# EAGLE board Qwiic Joystick v1.1.1-Panel (EAGLE 9.1.3)
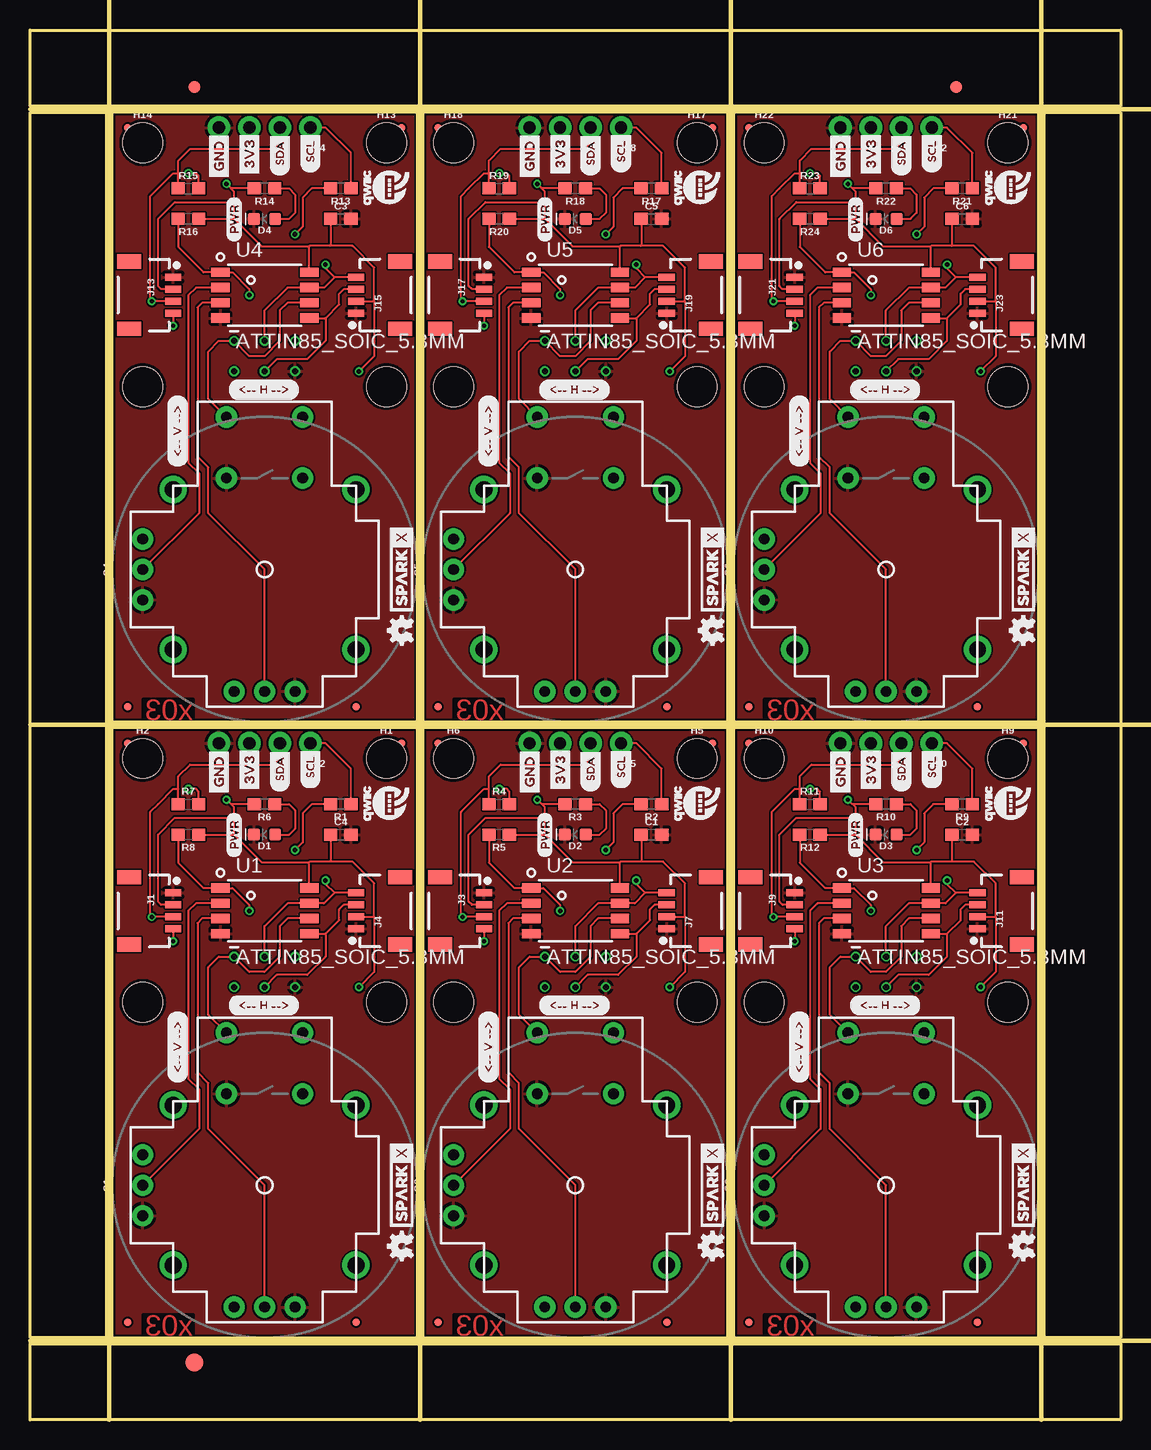
[diagram p0: board, top side]
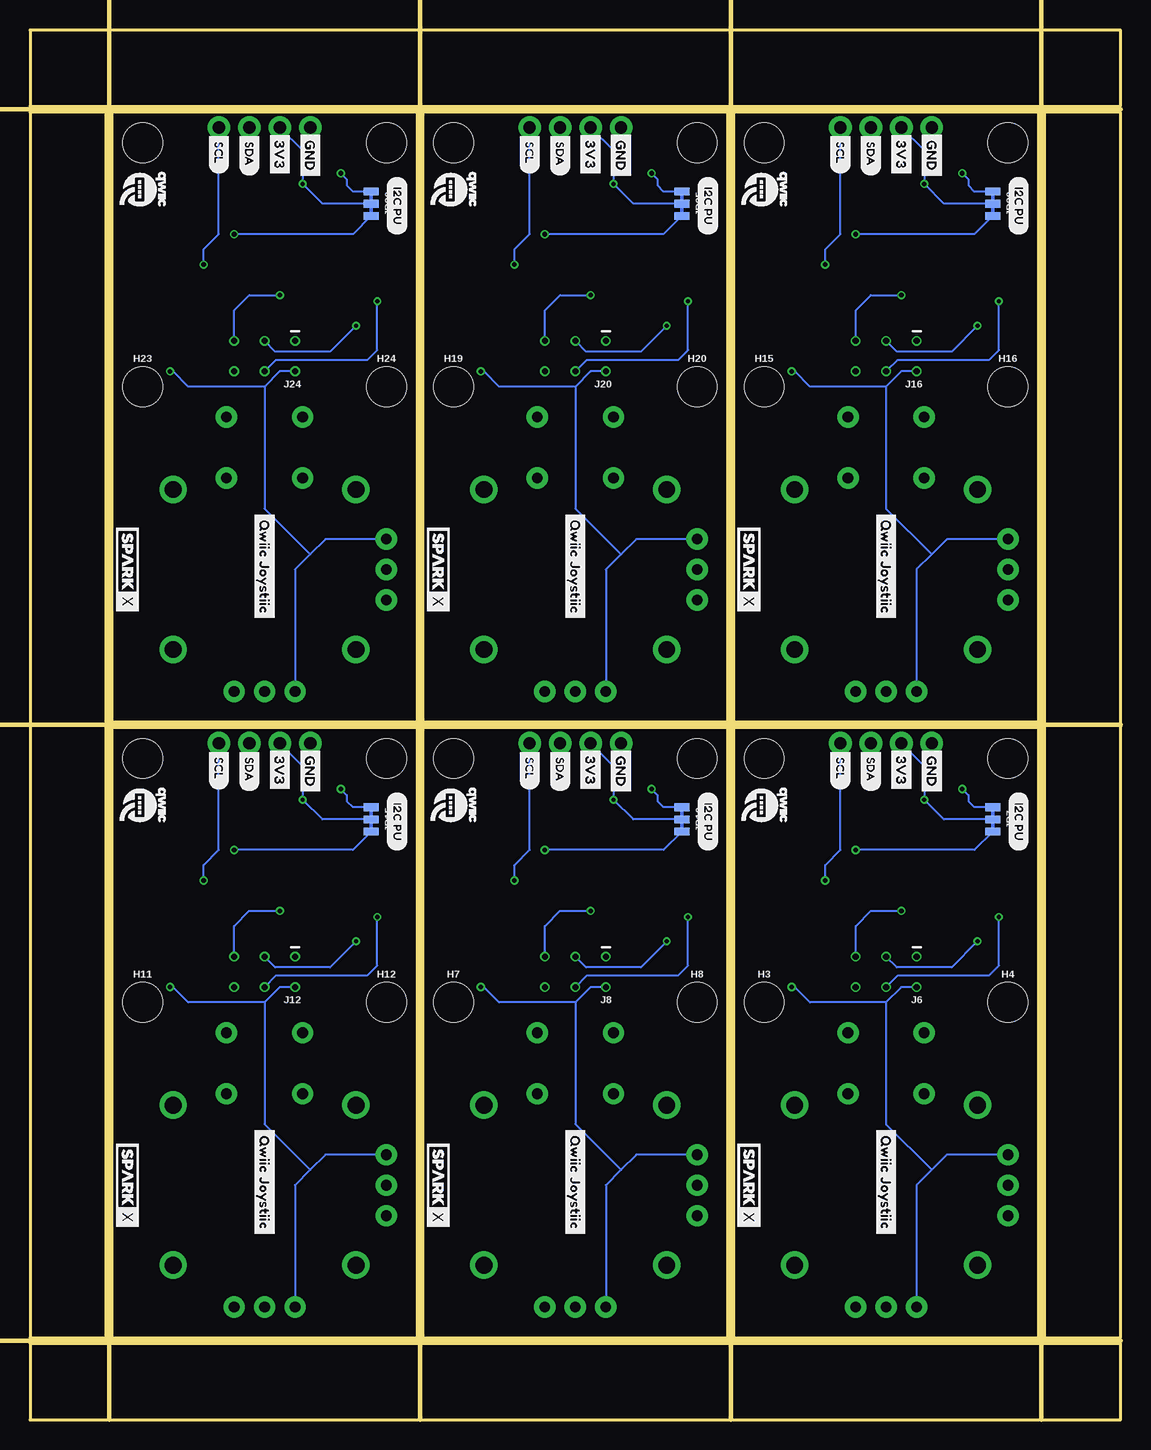
[diagram p1: board, bottom side, seen from below]

Size 90.93 x 115.82 mm. Coordinates in mm from the lower left corner, seen from the top.
Outline: 6.86,57.66 6.86,6.86 32.26,6.86 32.26,57.66 6.86,57.66
Outline: 32.77,57.66 32.77,6.86 58.17,6.86 58.17,57.66 32.77,57.66
Outline: 58.67,57.66 58.67,6.86 84.07,6.86 84.07,57.66 58.67,57.66
Outline: 6.86,108.97 6.86,58.17 32.26,58.17 32.26,108.97 6.86,108.97
Outline: 32.77,108.97 32.77,58.17 58.17,58.17 58.17,108.97 32.77,108.97
Outline: 58.67,108.97 58.67,58.17 84.07,58.17 84.07,108.97 58.67,108.97
Outline: 0,6.35 90.93,6.35 90.93,0 0,0 0,6.35
Outline: 84.58,108.97 90.93,108.97 90.93,6.86 84.58,6.86 84.58,108.97
Outline: 0,115.82 90.93,115.82 90.93,109.47 0,109.47 0,115.82
Outline: 0,108.97 6.35,108.97 6.35,6.86 0,6.86 0,108.97
Copper layers (1*16): Top 0.035mm / dielectric 1.5mm / Bottom 0.035mm
Design rules "SparkFun-2-layer-PCBWay-LIMIT": minimum track width 6mil, minimum drill 0.3mm, track to track 6mil, track to pad 6mil, pad to pad 6mil, via to via 6mil, smd to smd 6mil, copper to edge 6mil, drill to drill 6mil, minimum pad ring 6mil, minimum via ring 6mil, stop-mask expansion 4mil, vias tented up to drill 25mil, thermal gap 10mil
Milling: 7 lines

## Footprints (pad centres in the part's own frame; a part is rotated, then mirrored left to right if it is on the bottom)
0603 = smd 1.1 x 1: 1 -0.85,0; 2 0.85,0
LED-0603 = smd 1 x 1: A -0.877,0; C 0.877,0
FIDUCIAL-1X2 = smd 1 x 1: 1 0,0
FIDUCIAL-1.5X3 = smd 1.5 x 1.5: 1 0,0
STAND-OFF = hole 3.302: 0,0
1X04_1MM_RA = smd 0.6 x 1.35: 1 -1.5,0; 2 -0.5,0; 3 0.5,0; 4 1.5,0 | smd 1.2 x 2: NC1 2.8,-3.675; NC2 -2.8,-3.675
1X04_NO_SILK = drill 1.016 pad 1.88: 1 0,0; 2 2.54,0; 3 5.08,0; 4 7.62,0
2X3_TEST_POINTS = drill 0.508: 1 -2.54,-1.27; 2 -2.54,1.27; 3 0,-1.27; 4 0,1.27; 5 2.54,-1.27; 6 2.54,1.27
MICRO-FIDUCIAL = smd 0.635 x 0.635: 1 0,0
SMT-JUMPER_3_2-NC_TRACE_NO-SILK = smd 0.635 x 1.27: 1 -1.016,0; 2 0,0; 3 1.016,0
JOYSTICK = drill 0.9 pad 1.778: B1A -3.175,12.7; B1B 3.175,12.7; B2A -3.175,7.62; B2B 3.175,7.62 | drill 0.889 pad 1.778: H1 -2.54,-10.16; H2 0,-10.16; H3 2.54,-10.16; V1 -10.16,2.54; V2 -10.16,0; V3 -10.16,-2.54 | drill 1.397 pad 2.286: MOUNT1 -7.62,6.668; MOUNT2 -7.62,-6.668; MOUNT3 7.62,-6.668; MOUNT4 7.62,6.668
ATTINY85 = smd 1.524 x 0.762: 1 -3.683,1.905; 2 -3.683,0.635; 3 -3.683,-0.635; 4 -3.683,-1.905; 5 3.727,-1.905; 6 3.727,-0.635; 7 3.727,0.635; 8 3.727,1.905

## Placement (x,y rotation side)
C1  0.1uF  [0603]  51.82,48.77 0 top
C2  0.1uF  [0603]  77.72,48.77 0 top
C3  0.1uF  [0603]  25.91,100.08 0 top
C4  0.1uF  [0603]  25.91,48.77 0 top
C5  0.1uF  [0603]  51.82,100.08 0 top
C6  0.1uF  [0603]  77.72,100.08 0 top
D1  RED  [LED-0603]  19.56,48.77 180 top
D2  RED  [LED-0603]  45.47,48.77 180 top
D3  RED  [LED-0603]  71.37,48.77 180 top
D4  RED  [LED-0603]  19.56,100.08 180 top
D5  RED  [LED-0603]  45.47,100.08 180 top
D6  RED  [LED-0603]  71.37,100.08 180 top
E$1  [FIDUCIAL-1X2]  13.72,111.06 0 top
E$2  [FIDUCIAL-1X2]  77.22,111.06 0 top
E$3  [FIDUCIAL-1.5X3]  13.72,4.76 0 top
FRAME1  FRAME-LETTER  [CREATIVE_COMMONS]  -5.84,-5.84 0 top  (outside the outline)
FRAME2  FRAME-LETTER  [CREATIVE_COMMONS]  20.07,-5.84 0 top  (outside the outline)
FRAME3  FRAME-LETTER  [CREATIVE_COMMONS]  45.97,-5.84 0 top  (outside the outline)
FRAME4  FRAME-LETTER  [CREATIVE_COMMONS]  -5.84,45.47 0 top  (outside the outline)
FRAME5  FRAME-LETTER  [CREATIVE_COMMONS]  20.07,45.47 0 top
FRAME6  FRAME-LETTER  [CREATIVE_COMMONS]  45.97,45.47 0 top
H1  STAND-OFF  [STAND-OFF]  29.72,55.12 0 top
H2  STAND-OFF  [STAND-OFF]  9.4,55.12 0 top
H3  STAND-OFF  [STAND-OFF]  29.72,34.8 0 bottom
H4  STAND-OFF  [STAND-OFF]  9.4,34.8 0 bottom
H5  STAND-OFF  [STAND-OFF]  55.63,55.12 0 top
H6  STAND-OFF  [STAND-OFF]  35.31,55.12 0 top
H7  STAND-OFF  [STAND-OFF]  55.63,34.8 0 bottom
H8  STAND-OFF  [STAND-OFF]  35.31,34.8 0 bottom
H9  STAND-OFF  [STAND-OFF]  81.53,55.12 0 top
H10  STAND-OFF  [STAND-OFF]  61.21,55.12 0 top
H11  STAND-OFF  [STAND-OFF]  81.53,34.8 0 bottom
H12  STAND-OFF  [STAND-OFF]  61.21,34.8 0 bottom
H13  STAND-OFF  [STAND-OFF]  29.72,106.43 0 top
H14  STAND-OFF  [STAND-OFF]  9.4,106.43 0 top
H15  STAND-OFF  [STAND-OFF]  29.72,86.11 0 bottom
H16  STAND-OFF  [STAND-OFF]  9.4,86.11 0 bottom
H17  STAND-OFF  [STAND-OFF]  55.63,106.43 0 top
H18  STAND-OFF  [STAND-OFF]  35.31,106.43 0 top
H19  STAND-OFF  [STAND-OFF]  55.63,86.11 0 bottom
H20  STAND-OFF  [STAND-OFF]  35.31,86.11 0 bottom
H21  STAND-OFF  [STAND-OFF]  81.53,106.43 0 top
H22  STAND-OFF  [STAND-OFF]  61.21,106.43 0 top
H23  STAND-OFF  [STAND-OFF]  81.53,86.11 0 bottom
H24  STAND-OFF  [STAND-OFF]  61.21,86.11 0 bottom
J1  Qwiic Right Angle  [1X04_1MM_RA]  11.94,42.42 270 top
J2  [1X04_NO_SILK]  23.37,56.39 180 top
J3  Qwiic Right Angle  [1X04_1MM_RA]  37.85,42.42 270 top
J4  Qwiic Right Angle  [1X04_1MM_RA]  27.18,42.42 90 top
J5  [1X04_NO_SILK]  49.28,56.39 180 top
J6  AVR_SPI_PROG_3X2TESTPOINTS  [2X3_TEST_POINTS]  19.56,37.34 180 bottom
J7  Qwiic Right Angle  [1X04_1MM_RA]  53.09,42.42 90 top
J8  AVR_SPI_PROG_3X2TESTPOINTS  [2X3_TEST_POINTS]  45.47,37.34 180 bottom
J9  Qwiic Right Angle  [1X04_1MM_RA]  63.75,42.42 270 top
J10  [1X04_NO_SILK]  75.18,56.39 180 top
J11  Qwiic Right Angle  [1X04_1MM_RA]  78.99,42.42 90 top
J12  AVR_SPI_PROG_3X2TESTPOINTS  [2X3_TEST_POINTS]  71.37,37.34 180 bottom
J13  Qwiic Right Angle  [1X04_1MM_RA]  11.94,93.73 270 top
J14  [1X04_NO_SILK]  23.37,107.7 180 top
J15  Qwiic Right Angle  [1X04_1MM_RA]  27.18,93.73 90 top
J16  AVR_SPI_PROG_3X2TESTPOINTS  [2X3_TEST_POINTS]  19.56,88.65 180 bottom
J17  Qwiic Right Angle  [1X04_1MM_RA]  37.85,93.73 270 top
J18  [1X04_NO_SILK]  49.28,107.7 180 top
J19  Qwiic Right Angle  [1X04_1MM_RA]  53.09,93.73 90 top
J20  AVR_SPI_PROG_3X2TESTPOINTS  [2X3_TEST_POINTS]  45.47,88.65 180 bottom
J21  Qwiic Right Angle  [1X04_1MM_RA]  63.75,93.73 270 top
J22  [1X04_NO_SILK]  75.18,107.7 180 top
J23  Qwiic Right Angle  [1X04_1MM_RA]  78.99,93.73 90 top
J24  AVR_SPI_PROG_3X2TESTPOINTS  [2X3_TEST_POINTS]  71.37,88.65 180 bottom
JP1  FIDUCIALUFIDUCIAL  [MICRO-FIDUCIAL]  30.99,56.39 270 top
JP2  FIDUCIALUFIDUCIAL  [MICRO-FIDUCIAL]  8.13,8.13 0 top
JP3  FIDUCIALUFIDUCIAL  [MICRO-FIDUCIAL]  27.18,8.13 270 top
JP4  FIDUCIALUFIDUCIAL  [MICRO-FIDUCIAL]  56.9,56.39 270 top
JP5  FIDUCIALUFIDUCIAL  [MICRO-FIDUCIAL]  34.04,8.13 0 top
JP6  FIDUCIALUFIDUCIAL  [MICRO-FIDUCIAL]  8.13,56.39 270 top
JP7  JUMPER-SMT_3_2-NC_TRACE_NO-SILK  [SMT-JUMPER_3_2-NC_TRACE_NO-SILK]  10.67,50.04 270 bottom
JP8  FIDUCIALUFIDUCIAL  [MICRO-FIDUCIAL]  53.09,8.13 270 top
JP9  FIDUCIALUFIDUCIAL  [MICRO-FIDUCIAL]  34.04,56.39 270 top
JP10  JUMPER-SMT_3_2-NC_TRACE_NO-SILK  [SMT-JUMPER_3_2-NC_TRACE_NO-SILK]  36.58,50.04 270 bottom
JP11  FIDUCIALUFIDUCIAL  [MICRO-FIDUCIAL]  82.8,56.39 270 top
JP12  FIDUCIALUFIDUCIAL  [MICRO-FIDUCIAL]  59.94,8.13 0 top
JP13  FIDUCIALUFIDUCIAL  [MICRO-FIDUCIAL]  78.99,8.13 270 top
JP14  FIDUCIALUFIDUCIAL  [MICRO-FIDUCIAL]  59.94,56.39 270 top
JP15  JUMPER-SMT_3_2-NC_TRACE_NO-SILK  [SMT-JUMPER_3_2-NC_TRACE_NO-SILK]  62.48,50.04 270 bottom
JP16  FIDUCIALUFIDUCIAL  [MICRO-FIDUCIAL]  30.99,107.7 270 top
JP17  FIDUCIALUFIDUCIAL  [MICRO-FIDUCIAL]  8.13,59.44 0 top
JP18  FIDUCIALUFIDUCIAL  [MICRO-FIDUCIAL]  27.18,59.44 270 top
JP19  FIDUCIALUFIDUCIAL  [MICRO-FIDUCIAL]  8.13,107.7 270 top
JP20  JUMPER-SMT_3_2-NC_TRACE_NO-SILK  [SMT-JUMPER_3_2-NC_TRACE_NO-SILK]  10.67,101.35 270 bottom
JP21  FIDUCIALUFIDUCIAL  [MICRO-FIDUCIAL]  56.9,107.7 270 top
JP22  FIDUCIALUFIDUCIAL  [MICRO-FIDUCIAL]  34.04,59.44 0 top
JP23  FIDUCIALUFIDUCIAL  [MICRO-FIDUCIAL]  53.09,59.44 270 top
JP24  FIDUCIALUFIDUCIAL  [MICRO-FIDUCIAL]  34.04,107.7 270 top
JP25  JUMPER-SMT_3_2-NC_TRACE_NO-SILK  [SMT-JUMPER_3_2-NC_TRACE_NO-SILK]  36.58,101.35 270 bottom
JP26  FIDUCIALUFIDUCIAL  [MICRO-FIDUCIAL]  82.8,107.7 270 top
JP27  FIDUCIALUFIDUCIAL  [MICRO-FIDUCIAL]  59.94,59.44 0 top
JP28  FIDUCIALUFIDUCIAL  [MICRO-FIDUCIAL]  78.99,59.44 270 top
JP29  FIDUCIALUFIDUCIAL  [MICRO-FIDUCIAL]  59.94,107.7 270 top
JP30  JUMPER-SMT_3_2-NC_TRACE_NO-SILK  [SMT-JUMPER_3_2-NC_TRACE_NO-SILK]  62.48,101.35 270 bottom
LOGO1  OSHW-LOGOMINI  [OSHW-LOGO-MINI]  30.99,14.48 90 top
LOGO2  OSHW-LOGOMINI  [OSHW-LOGO-MINI]  56.9,14.48 90 top
LOGO3  OSHW-LOGOMINI  [OSHW-LOGO-MINI]  82.8,14.48 90 top
LOGO4  OSHW-LOGOMINI  [OSHW-LOGO-MINI]  30.99,65.79 90 top
LOGO5  OSHW-LOGOMINI  [OSHW-LOGO-MINI]  56.9,65.79 90 top
LOGO6  OSHW-LOGOMINI  [OSHW-LOGO-MINI]  82.8,65.79 90 top
R1  2.2K  [0603]  25.91,51.31 180 top
R2  2.2K  [0603]  51.82,51.31 180 top
R3  1k  [0603]  45.47,51.31 180 top
R4  2.2K  [0603]  39.12,51.31 0 top
R5  10K  [0603]  39.12,48.77 180 top
R6  1k  [0603]  19.56,51.31 180 top
R7  2.2K  [0603]  13.21,51.31 0 top
R8  10K  [0603]  13.21,48.77 180 top
R9  2.2K  [0603]  77.72,51.31 180 top
R10  1k  [0603]  71.37,51.31 180 top
R11  2.2K  [0603]  65.02,51.31 0 top
R12  10K  [0603]  65.02,48.77 180 top
R13  2.2K  [0603]  25.91,102.62 180 top
R14  1k  [0603]  19.56,102.62 180 top
R15  2.2K  [0603]  13.21,102.62 0 top
R16  10K  [0603]  13.21,100.08 180 top
R17  2.2K  [0603]  51.82,102.62 180 top
R18  1k  [0603]  45.47,102.62 180 top
R19  2.2K  [0603]  39.12,102.62 0 top
R20  10K  [0603]  39.12,100.08 180 top
R21  2.2K  [0603]  77.72,102.62 180 top
R22  1k  [0603]  71.37,102.62 180 top
R23  2.2K  [0603]  65.02,102.62 0 top
R24  10K  [0603]  65.02,100.08 180 top
S1  JOYSTICK_THUMB  [JOYSTICK]  19.56,19.56 0 top
S2  JOYSTICK_THUMB  [JOYSTICK]  45.47,19.56 0 top
S3  JOYSTICK_THUMB  [JOYSTICK]  71.37,19.56 0 top
S4  JOYSTICK_THUMB  [JOYSTICK]  19.56,70.87 0 top
S5  JOYSTICK_THUMB  [JOYSTICK]  45.47,70.87 0 top
S6  JOYSTICK_THUMB  [JOYSTICK]  71.37,70.87 0 top
U1  ATTIN85_SOIC_5.3MM  [ATTINY85]  19.56,42.42 0 top
U2  ATTIN85_SOIC_5.3MM  [ATTINY85]  45.47,42.42 0 top
U3  ATTIN85_SOIC_5.3MM  [ATTINY85]  71.37,42.42 0 top
U4  ATTIN85_SOIC_5.3MM  [ATTINY85]  19.56,93.73 0 top
U5  ATTIN85_SOIC_5.3MM  [ATTINY85]  45.47,93.73 0 top
U6  ATTIN85_SOIC_5.3MM  [ATTINY85]  71.37,93.73 0 top
U$1  SPARKX-LOGO3  [SPARKX-SMALL]  30.99,19.56 90 top
U$2  SPARKX-LOGO3  [SPARKX-SMALL]  30.99,19.56 270 bottom
U$3  [QWIIC_JOYSTIIC6]  19.56,24.64 270 bottom
U$4  [I2C_PU0]  8.51,52.32 270 bottom
U$5  [SDA0]  20.83,56.13 270 bottom
U$6  [GND4]  15.75,51.82 90 top
U$7  [###_V_###0]  12.32,28.07 90 top
U$8  [GND4]  15.75,56.26 270 bottom
U$9  [SCL1]  23.37,56.13 270 bottom
U$10  [QWIIC-LOGO-SMALL]  29.72,51.31 270 bottom
U$11  [SCL3]  23.37,52.58 90 top
U$12  [SDA2]  20.83,52.32 90 top
U$13  SPARKX-LOGO3  [SPARKX-SMALL]  56.9,19.56 90 top
U$14  [PWR-()-03]  17.02,46.86 90 top
U$15  [###_H_###1]  16.51,34.54 0 top
U$16  [3V35]  18.29,52.07 90 top
U$17  [3V35]  18.29,56.26 270 bottom
U$18  SPARKX-LOGO3  [SPARKX-SMALL]  56.9,19.56 270 bottom
U$19  [QWIIC-LOGO-SMALL]  55.63,51.31 270 bottom
U$20  [PWR-()-03]  42.93,46.86 90 top
U$21  [###_V_###0]  38.23,28.07 90 top
U$22  [QWIIC-LOGO-SMALL]  29.72,51.31 90 top
U$23  [###_H_###1]  42.42,34.54 0 top
U$24  [QWIIC-LOGO-SMALL]  55.63,51.31 90 top
U$25  [SDA0]  46.74,56.13 270 bottom
U$26  [SCL1]  49.28,56.13 270 bottom
U$27  [SCL3]  49.28,52.58 90 top
U$28  [SDA2]  46.74,52.32 90 top
U$29  [QWIIC_JOYSTIIC6]  45.47,24.64 270 bottom
U$30  [GND4]  41.66,51.82 90 top
U$31  [GND4]  41.66,56.26 270 bottom
U$32  [3V35]  44.2,52.07 90 top
U$33  [3V35]  44.2,56.26 270 bottom
U$34  [I2C_PU0]  34.42,52.32 270 bottom
U$35  SPARKX-LOGO3  [SPARKX-SMALL]  82.8,19.56 90 top
U$36  SPARKX-LOGO3  [SPARKX-SMALL]  82.8,19.56 270 bottom
U$37  [QWIIC-LOGO-SMALL]  81.53,51.31 270 bottom
U$38  [PWR-()-03]  68.83,46.86 90 top
U$39  [###_V_###0]  64.14,28.07 90 top
U$40  [###_H_###1]  68.33,34.54 0 top
U$41  [QWIIC-LOGO-SMALL]  81.53,51.31 90 top
U$42  [SDA0]  72.64,56.13 270 bottom
U$43  [SCL1]  75.18,56.13 270 bottom
U$44  [SCL3]  75.18,52.58 90 top
U$45  [SDA2]  72.64,52.32 90 top
U$46  [QWIIC_JOYSTIIC6]  71.37,24.64 270 bottom
U$47  [GND4]  67.56,51.82 90 top
U$48  [GND4]  67.56,56.26 270 bottom
U$49  [3V35]  70.1,52.07 90 top
U$50  [3V35]  70.1,56.26 270 bottom
U$51  [I2C_PU0]  60.32,52.32 270 bottom
U$52  SPARKX-LOGO3  [SPARKX-SMALL]  30.99,70.87 90 top
U$53  SPARKX-LOGO3  [SPARKX-SMALL]  30.99,70.87 270 bottom
U$54  [QWIIC-LOGO-SMALL]  29.72,102.62 270 bottom
U$55  [PWR-()-03]  17.02,98.17 90 top
U$56  [###_V_###0]  12.32,79.38 90 top
U$57  [###_H_###1]  16.51,85.85 0 top
U$58  [QWIIC-LOGO-SMALL]  29.72,102.62 90 top
U$59  [SDA0]  20.83,107.44 270 bottom
U$60  [SCL1]  23.37,107.44 270 bottom
U$61  [SCL3]  23.37,103.89 90 top
U$62  [SDA2]  20.83,103.63 90 top
U$63  [QWIIC_JOYSTIIC6]  19.56,75.95 270 bottom
U$64  [GND4]  15.75,103.12 90 top
U$65  [GND4]  15.75,107.57 270 bottom
U$66  [3V35]  18.29,103.38 90 top
U$67  [3V35]  18.29,107.57 270 bottom
U$68  [I2C_PU0]  8.51,103.63 270 bottom
U$69  SPARKX-LOGO3  [SPARKX-SMALL]  56.9,70.87 90 top
U$70  SPARKX-LOGO3  [SPARKX-SMALL]  56.9,70.87 270 bottom
U$71  [QWIIC-LOGO-SMALL]  55.63,102.62 270 bottom
U$72  [PWR-()-03]  42.93,98.17 90 top
U$73  [###_V_###0]  38.23,79.38 90 top
U$74  [###_H_###1]  42.42,85.85 0 top
U$75  [QWIIC-LOGO-SMALL]  55.63,102.62 90 top
U$76  [SDA0]  46.74,107.44 270 bottom
U$77  [SCL1]  49.28,107.44 270 bottom
U$78  [SCL3]  49.28,103.89 90 top
U$79  [SDA2]  46.74,103.63 90 top
U$80  [QWIIC_JOYSTIIC6]  45.47,75.95 270 bottom
U$81  [GND4]  41.66,103.12 90 top
U$82  [GND4]  41.66,107.57 270 bottom
U$83  [3V35]  44.2,103.38 90 top
U$84  [3V35]  44.2,107.57 270 bottom
U$85  [I2C_PU0]  34.42,103.63 270 bottom
U$86  SPARKX-LOGO3  [SPARKX-SMALL]  82.8,70.87 90 top
U$87  SPARKX-LOGO3  [SPARKX-SMALL]  82.8,70.87 270 bottom
U$88  [QWIIC-LOGO-SMALL]  81.53,102.62 270 bottom
U$89  [PWR-()-03]  68.83,98.17 90 top
U$90  [###_V_###0]  64.14,79.38 90 top
U$91  [###_H_###1]  68.33,85.85 0 top
U$92  [QWIIC-LOGO-SMALL]  81.53,102.62 90 top
U$93  [SDA0]  72.64,107.44 270 bottom
U$94  [SCL1]  75.18,107.44 270 bottom
U$95  [SCL3]  75.18,103.89 90 top
U$96  [SDA2]  72.64,103.63 90 top
U$97  [QWIIC_JOYSTIIC6]  71.37,75.95 270 bottom
U$98  [GND4]  67.56,103.12 90 top
U$99  [GND4]  67.56,107.57 270 bottom
U$100  [3V35]  70.1,103.38 90 top
U$101  [3V35]  70.1,107.57 270 bottom
U$102  [I2C_PU0]  60.32,103.63 270 bottom

## Library data of the parts
C1-C6 = SparkFun-Capacitors; PROD_ID: CAP-00810
D1-D6 = SparkFun-LED; PROD_ID: DIO-00819
E$1 E$2 FRAME1-FRAME6 LOGO1-LOGO6 = SparkFun-Aesthetics
E$3 = SparkFun-Retired
H1-H24 = SparkFun-Hardware
J1 J3 J4 J7 J9 J11 J13 J15 J17 J19 J21 J23 = SparkFun-Connectors; PROD_ID: CONN-13694
J2 J5 J10 J14 J18 J22 = SparkFun-Connectors; PROD_ID: CONN-09696
J6 J8 J12 J16 J20 J24 = SparkFun-Connectors
JP1-JP6 JP8 JP9 JP11-JP14 JP16-JP19 JP21-JP24 JP26-JP29 = SparkFun
JP7 JP10 JP15 JP20 JP25 JP30 = SparkFun-Jumpers
R1 R2 R4 R7 R9 R11 R13 R15 R17 R19 R21 R23 = SparkFun-Resistors; PROD_ID: RES-07857
R3 R6 R10 R14 R18 R22 = SparkFun-Resistors; PROD_ID: RES-07856
R5 R8 R12 R16 R20 R24 = SparkFun-Resistors; PROD_ID: RES-00818
S1-S6 = SparkFun-Switches; PROD_ID: COMP-09744; SF_SKU: COM-09032
U1-U6 = attiny85
U$1 U$2 U$13 U$18 U$35 U$36 U$52 U$53 U$69 U$70 U$86 U$87 = SparkX
U$3 U$6 U$8 U$16 U$17 U$29-U$33 U$46-U$50 U$63-U$67 U$80-U$84 U$97-U$101 = buzzard_labels (5)
U$4 U$34 U$51 U$68 U$85 U$102 = buzzard_labels (6)
U$5 U$9 U$11 U$12 U$25-U$28 U$42-U$45 U$59-U$62 U$76-U$79 U$93-U$96 = buzzard_labels (3)
U$7 U$15 U$21 U$23 U$39 U$40 U$56 U$57 U$73 U$74 U$90 U$91 = buzzard_labels (1)
U$10 U$14 U$19 U$20 U$22 U$24 U$37 U$38 U$41 U$54 U$55 U$58 U$71 U$72 U$75 U$88 U$89 U$92 = Labels

## Nets
3.3V: C4.1 J1.2 J2.3 J4.2 J6.2 JP7.2 R6.2 R8.1 S1.H1 S1.V1 U1.8
3.3V1: C1.1 J3.2 J5.3 J7.2 J8.2 JP10.2 R3.2 R5.1 S2.H1 S2.V1 U2.8
3.3V2: C2.1 J9.2 J10.3 J11.2 J12.2 JP15.2 R10.2 R12.1 S3.H1 S3.V1 U3.8
3.3V3: C3.1 J13.2 J14.3 J15.2 J16.2 JP20.2 R14.2 R16.1 S4.H1 S4.V1 U4.8
3.3V4: C5.1 J17.2 J18.3 J19.2 J20.2 JP25.2 R18.2 R20.1 S5.H1 S5.V1 U5.8
3.3V5: C6.1 J21.2 J22.3 J23.2 J24.2 JP30.2 R22.2 R24.1 S6.H1 S6.V1 U6.8
!RST: J6.5 R8.2 U1.1
!RST1: J8.5 R5.2 U2.1
!RST2: J12.5 R12.2 U3.1
!RST3: J16.5 R16.2 U4.1
!RST4: J20.5 R20.2 U5.1
!RST5: J24.5 R24.2 U6.1
GND: C4.2 D1.C J1.1 J2.4 J4.1 J6.6 S1.B2A S1.H3 S1.V3 U1.4
GND1: C1.2 D2.C J3.1 J5.4 J7.1 J8.6 S2.B2A S2.H3 S2.V3 U2.4
GND2: C2.2 D3.C J9.1 J10.4 J11.1 J12.6 S3.B2A S3.H3 S3.V3 U3.4
GND3: C3.2 D4.C J13.1 J14.4 J15.1 J16.6 S4.B2A S4.H3 S4.V3 U4.4
GND4: C5.2 D5.C J17.1 J18.4 J19.1 J20.6 S5.B2A S5.H3 S5.V3 U5.4
GND5: C6.2 D6.C J21.1 J22.4 J23.1 J24.6 S6.B2A S6.H3 S6.V3 U6.4
HORIZONTAL: S1.H2 U1.3
HORIZONTAL1: S2.H2 U2.3
HORIZONTAL2: S3.H2 U3.3
HORIZONTAL3: S4.H2 U4.3
HORIZONTAL4: S5.H2 U5.3
HORIZONTAL5: S6.H2 U6.3
MISO/6/SELECT: J6.1 S1.B1A U1.6
MISO/6/SELECT1: J8.1 S2.B1A U2.6
MISO/6/SELECT2: J12.1 S3.B1A U3.6
MISO/6/SELECT3: J16.1 S4.B1A U4.6
MISO/6/SELECT4: J20.1 S5.B1A U5.6
MISO/6/SELECT5: J24.1 S6.B1A U6.6
N$1: D1.A R6.1
N$2: JP7.1 R7.2
N$3: JP7.3 R1.2
N$4: D2.A R3.1
N$5: JP10.1 R4.2
N$6: JP10.3 R2.2
N$7: D3.A R10.1
N$8: JP15.1 R11.2
N$9: JP15.3 R9.2
N$10: D4.A R14.1
N$11: JP20.1 R15.2
N$12: JP20.3 R13.2
N$13: D5.A R18.1
N$14: JP25.1 R19.2
N$15: JP25.3 R17.2
N$16: D6.A R22.1
N$17: JP30.1 R23.2
N$18: JP30.3 R21.2
SCL: J1.4 J2.1 J4.4 J6.3 R1.1 U1.7
SCL1: J3.4 J5.1 J7.4 J8.3 R2.1 U2.7
SCL2: J9.4 J10.1 J11.4 J12.3 R9.1 U3.7
SCL3: J13.4 J14.1 J15.4 J16.3 R13.1 U4.7
SCL4: J17.4 J18.1 J19.4 J20.3 R17.1 U5.7
SCL5: J21.4 J22.1 J23.4 J24.3 R21.1 U6.7
SDA: J1.3 J2.2 J4.3 J6.4 R7.1 U1.5
SDA1: J3.3 J5.2 J7.3 J8.4 R4.1 U2.5
SDA2: J9.3 J10.2 J11.3 J12.4 R11.1 U3.5
SDA3: J13.3 J14.2 J15.3 J16.4 R15.1 U4.5
SDA4: J17.3 J18.2 J19.3 J20.4 R19.1 U5.5
SDA5: J21.3 J22.2 J23.3 J24.4 R23.1 U6.5
VERTICAL: S1.V2 U1.2
VERTICAL1: S2.V2 U2.2
VERTICAL2: S3.V2 U3.2
VERTICAL3: S4.V2 U4.2
VERTICAL4: S5.V2 U5.2
VERTICAL5: S6.V2 U6.2

## Tracks (layer width: path | path; a pad name or v marks a point on that pad's centre or on a via)
3.3V  (via drill 0.35, 0.38)
  Top 0.152: 28.7,41.91 28.7,44.7 26.88,46.52 25.02,46.52 | 28.7,41.91 28.7,37.34 v27.43,36.07 | J4.2 28.69,41.92 28.7,41.91 | R6.2 16.76,51.31 v16.38,51.69 17.02,51.05 17.02,50.16 | 17.02,48.77 19.3,46.48 23.29,46.48 | J1.2 10.93,42.92 10.67,43.18 10.67,48.77 12.06,50.16 17.02,50.16 | 17.02,48.77 17.02,50.16 | U1.8 23.29,46.48 | 23.29,46.48 23.33,46.52 25.02,46.52 | R8.1 17.02,48.77 | C4.1 25.06,46.56 25.02,46.52
  Bottom 0.152: S1.V1 14.48,22.1 15.75,20.83 | 15.75,20.83 17.02,19.56 S1.H1 | 15.75,20.83 19.56,24.64 19.56,34.8 | J6.2 18.29,36.07 19.56,34.8 | 19.56,34.8 25.91,34.8 27.18,36.07 v27.43,36.07 | JP7.2 14.73,50.04 v16.38,51.69 16.38,54.48 J2.3
3.3V1  (via drill 0.35, 0.38)
  Top 0.152: 54.61,41.91 54.61,44.7 52.79,46.52 50.93,46.52 | 54.61,41.91 54.61,37.34 v53.34,36.07 | J7.2 54.6,41.92 54.61,41.91 | R3.2 42.67,51.31 v42.29,51.69 42.93,51.05 42.93,50.16 | 42.93,48.77 45.21,46.48 49.19,46.48 | J3.2 36.84,42.92 36.58,43.18 36.58,48.77 37.97,50.16 42.93,50.16 | 42.93,48.77 42.93,50.16 | U2.8 49.19,46.48 | 49.19,46.48 49.23,46.52 50.93,46.52 | R5.1 42.93,48.77 | C1.1 50.97,46.56 50.93,46.52
  Bottom 0.152: S2.V1 40.39,22.1 41.66,20.83 | 41.66,20.83 42.93,19.56 S2.H1 | 41.66,20.83 45.47,24.64 45.47,34.8 | J8.2 44.2,36.07 45.47,34.8 | 45.47,34.8 51.82,34.8 53.09,36.07 v53.34,36.07 | JP10.2 40.64,50.04 v42.29,51.69 42.29,54.48 J5.3
3.3V2  (via drill 0.35, 0.38)
  Top 0.152: 80.52,41.91 80.52,44.7 78.7,46.52 76.84,46.52 | 80.52,41.91 80.52,37.34 v79.25,36.07 | J11.2 80.51,41.92 80.52,41.91 | R10.2 68.58,51.31 v68.2,51.69 68.83,51.05 68.83,50.16 | 68.83,48.77 71.12,46.48 75.1,46.48 | J9.2 62.75,42.92 62.48,43.18 62.48,48.77 63.88,50.16 68.83,50.16 | 68.83,48.77 68.83,50.16 | U3.8 75.1,46.48 | 75.1,46.48 75.14,46.52 76.84,46.52 | R12.1 68.83,48.77 | C2.1 76.87,46.56 76.84,46.52
  Bottom 0.152: S3.V1 66.29,22.1 67.56,20.83 | 67.56,20.83 68.83,19.56 S3.H1 | 67.56,20.83 71.37,24.64 71.37,34.8 | J12.2 70.1,36.07 71.37,34.8 | 71.37,34.8 77.72,34.8 78.99,36.07 v79.25,36.07 | JP15.2 66.55,50.04 v68.2,51.69 68.2,54.48 J10.3
3.3V3  (via drill 0.35, 0.38)
  Top 0.152: 28.7,93.22 28.7,96.01 26.88,97.83 25.02,97.83 | 28.7,93.22 28.7,88.65 v27.43,87.38 | J15.2 28.69,93.23 28.7,93.22 | R14.2 16.76,102.62 v16.38,103 17.02,102.36 17.02,101.47 | 17.02,100.08 19.3,97.79 23.29,97.79 | J13.2 10.93,94.23 10.67,94.49 10.67,100.08 12.06,101.47 17.02,101.47 | 17.02,100.08 17.02,101.47 | U4.8 23.29,97.79 | 23.29,97.79 23.33,97.83 25.02,97.83 | R16.1 17.02,100.08 | C3.1 25.06,97.87 25.02,97.83
  Bottom 0.152: S4.V1 14.48,73.41 15.75,72.14 | 15.75,72.14 17.02,70.87 S4.H1 | 15.75,72.14 19.56,75.95 19.56,86.11 | J16.2 18.29,87.38 19.56,86.11 | 19.56,86.11 25.91,86.11 27.18,87.38 v27.43,87.38 | JP20.2 14.73,101.35 v16.38,103 16.38,105.79 J14.3
3.3V4  (via drill 0.35, 0.38)
  Top 0.152: 54.61,93.22 54.61,96.01 52.79,97.83 50.93,97.83 | 54.61,93.22 54.61,88.65 v53.34,87.38 | J19.2 54.6,93.23 54.61,93.22 | R18.2 42.67,102.62 v42.29,103 42.93,102.36 42.93,101.47 | 42.93,100.08 45.21,97.79 49.19,97.79 | J17.2 36.84,94.23 36.58,94.49 36.58,100.08 37.97,101.47 42.93,101.47 | 42.93,100.08 42.93,101.47 | U5.8 49.19,97.79 | 49.19,97.79 49.23,97.83 50.93,97.83 | R20.1 42.93,100.08 | C5.1 50.97,97.87 50.93,97.83
  Bottom 0.152: S5.V1 40.39,73.41 41.66,72.14 | 41.66,72.14 42.93,70.87 S5.H1 | 41.66,72.14 45.47,75.95 45.47,86.11 | J20.2 44.2,87.38 45.47,86.11 | 45.47,86.11 51.82,86.11 53.09,87.38 v53.34,87.38 | JP25.2 40.64,101.35 v42.29,103 42.29,105.79 J18.3
3.3V5  (via drill 0.35, 0.38)
  Top 0.152: 80.52,93.22 80.52,96.01 78.7,97.83 76.84,97.83 | 80.52,93.22 80.52,88.65 v79.25,87.38 | J23.2 80.51,93.23 80.52,93.22 | R22.2 68.58,102.62 v68.2,103 68.83,102.36 68.83,101.47 | 68.83,100.08 71.12,97.79 75.1,97.79 | J21.2 62.75,94.23 62.48,94.49 62.48,100.08 63.88,101.47 68.83,101.47 | 68.83,100.08 68.83,101.47 | U6.8 75.1,97.79 | 75.1,97.79 75.14,97.83 76.84,97.83 | R24.1 68.83,100.08 | C6.1 76.87,97.87 76.84,97.83
  Bottom 0.152: S6.V1 66.29,73.41 67.56,72.14 | 67.56,72.14 68.83,70.87 S6.H1 | 67.56,72.14 71.37,75.95 71.37,86.11 | J24.2 70.1,87.38 71.37,86.11 | 71.37,86.11 77.72,86.11 78.99,87.38 v79.25,87.38 | JP30.2 66.55,101.35 v68.2,103 68.2,105.79 J22.3
!RST  (via drill 0.38)
  Top 0.152: R8.2 12.36,46.44 14.48,44.32 U1.1 16.89,44.32 18.29,42.93 v18.29,42.42
  Bottom 0.152: J6.5 22.1,41.15 20.83,42.42 v18.29,42.42
!RST1  (via drill 0.38)
  Top 0.152: R5.2 38.27,46.44 40.39,44.32 U2.1 42.8,44.32 44.2,42.93 v44.2,42.42
  Bottom 0.152: J8.5 48.01,41.15 46.74,42.42 v44.2,42.42
!RST2  (via drill 0.38)
  Top 0.152: R12.2 64.17,46.44 66.29,44.32 U3.1 68.71,44.32 70.1,42.93 v70.1,42.42
  Bottom 0.152: J12.5 73.91,41.15 72.64,42.42 v70.1,42.42
!RST3  (via drill 0.38)
  Top 0.152: R16.2 12.36,97.75 14.48,95.63 U4.1 16.89,95.63 18.29,94.23 v18.29,93.73
  Bottom 0.152: J16.5 22.1,92.46 20.83,93.73 v18.29,93.73
!RST4  (via drill 0.38)
  Top 0.152: R20.2 38.27,97.75 40.39,95.63 U5.1 42.8,95.63 44.2,94.23 v44.2,93.73
  Bottom 0.152: J20.5 48.01,92.46 46.74,93.73 v44.2,93.73
!RST5  (via drill 0.38)
  Top 0.152: R24.2 64.17,97.75 66.29,95.63 U6.1 68.71,95.63 70.1,94.23 v70.1,93.73
  Bottom 0.152: J24.5 73.91,92.46 72.64,93.73 v70.1,93.73
GND
  pour Top: 6.86,6.86 32.26,6.86 32.26,57.66 6.86,57.66
  pour Top (isolate 0.305): 32.26,6.86 6.86,6.86 6.86,57.66 32.26,57.66
GND1
  pour Top: 32.77,6.86 58.17,6.86 58.17,57.66 32.77,57.66
  pour Top (isolate 0.305): 58.17,6.86 32.77,6.86 32.77,57.66 58.17,57.66
GND2
  pour Top: 58.67,6.86 84.07,6.86 84.07,57.66 58.67,57.66
  pour Top (isolate 0.305): 84.07,6.86 58.67,6.86 58.67,57.66 84.07,57.66
GND3
  pour Top: 6.86,58.17 32.26,58.17 32.26,108.97 6.86,108.97
  pour Top (isolate 0.305): 32.26,58.17 6.86,58.17 6.86,108.97 32.26,108.97
GND4
  pour Top: 32.77,58.17 58.17,58.17 58.17,108.97 32.77,108.97
  pour Top (isolate 0.305): 58.17,58.17 32.77,58.17 32.77,108.97 58.17,108.97
GND5
  pour Top: 58.67,58.17 84.07,58.17 84.07,108.97 58.67,108.97
  pour Top (isolate 0.305): 84.07,58.17 58.67,58.17 58.67,108.97 84.07,108.97
HORIZONTAL
  Top 0.152: U1.3 14.35,41.78 13.97,41.4 13.97,28.96 14.86,28.07 14.86,24.26 19.56,19.56 S1.H2
HORIZONTAL1
  Top 0.152: U2.3 40.26,41.78 39.88,41.4 39.88,28.96 40.77,28.07 40.77,24.26 45.47,19.56 S2.H2
HORIZONTAL2
  Top 0.152: U3.3 66.17,41.78 65.79,41.4 65.79,28.96 66.67,28.07 66.67,24.26 71.37,19.56 S3.H2
HORIZONTAL3
  Top 0.152: U4.3 14.35,93.09 13.97,92.71 13.97,80.26 14.86,79.38 14.86,75.56 19.56,70.87 S4.H2
HORIZONTAL4
  Top 0.152: U5.3 40.26,93.09 39.88,92.71 39.88,80.26 40.77,79.38 40.77,75.56 45.47,70.87 S5.H2
HORIZONTAL5
  Top 0.152: U6.3 66.17,93.09 65.79,92.71 65.79,80.26 66.67,79.38 66.67,75.56 71.37,70.87 S6.H2
MISO/6/SELECT
  Top 0.152: U1.6 21.46,41.78 20.83,41.15 20.83,38.61 19.56,37.34 18.29,37.34 J6.1 15.75,38.61 14.86,37.72 14.86,33.78 S1.B1A
MISO/6/SELECT1
  Top 0.152: U2.6 47.37,41.78 46.74,41.15 46.74,38.61 45.47,37.34 44.2,37.34 J8.1 41.66,38.61 40.77,37.72 40.77,33.78 S2.B1A
MISO/6/SELECT2
  Top 0.152: U3.6 73.28,41.78 72.64,41.15 72.64,38.61 71.37,37.34 70.1,37.34 J12.1 67.56,38.61 66.67,37.72 66.67,33.78 S3.B1A
MISO/6/SELECT3
  Top 0.152: U4.6 21.46,93.09 20.83,92.46 20.83,89.92 19.56,88.65 18.29,88.65 J16.1 15.75,89.92 14.86,89.03 14.86,85.09 S4.B1A
MISO/6/SELECT4
  Top 0.152: U5.6 47.37,93.09 46.74,92.46 46.74,89.92 45.47,88.65 44.2,88.65 J20.1 41.66,89.92 40.77,89.03 40.77,85.09 S5.B1A
MISO/6/SELECT5
  Top 0.152: U6.6 73.28,93.09 72.64,92.46 72.64,89.92 71.37,88.65 70.1,88.65 J24.1 67.56,89.92 66.67,89.03 66.67,85.09 S6.B1A
N$1
  Top 0.152: D1.A 21.59,48.77 22.1,49.28 22.1,50.8 21.59,51.31 R6.1
N$2  (via drill 0.38)
  Top 0.152: R7.2 14.06,52.36 13.84,52.58 v13.21,52.58
  Bottom 0.152: JP7.1 12.19,51.05 12.7,51.56 12.7,52.07 v13.21,52.58
N$3  (via drill 0.38)
  Top 0.152: R1.2 23.5,51.31 22.73,50.55 22.73,48.13 v22.1,47.5
  Bottom 0.152: JP7.3 12.19,47.5 v22.1,47.5
N$4
  Top 0.152: D2.A 47.5,48.77 48.01,49.28 48.01,50.8 47.5,51.31 R3.1
N$5  (via drill 0.38)
  Top 0.152: R4.2 39.97,52.36 39.75,52.58 v39.12,52.58
  Bottom 0.152: JP10.1 38.1,51.05 38.61,51.56 38.61,52.07 v39.12,52.58
N$6  (via drill 0.38)
  Top 0.152: R2.2 49.4,51.31 48.64,50.55 48.64,48.13 v48.01,47.5
  Bottom 0.152: JP10.3 38.1,47.5 v48.01,47.5
N$7
  Top 0.152: D3.A 73.41,48.77 73.91,49.28 73.91,50.8 73.41,51.31 R10.1
N$8  (via drill 0.38)
  Top 0.152: R11.2 65.87,52.36 65.66,52.58 v65.02,52.58
  Bottom 0.152: JP15.1 64.01,51.05 64.52,51.56 64.52,52.07 v65.02,52.58
N$9  (via drill 0.38)
  Top 0.152: R9.2 75.31,51.31 74.55,50.55 74.55,48.13 v73.91,47.5
  Bottom 0.152: JP15.3 64.01,47.5 v73.91,47.5
N$10
  Top 0.152: D4.A 21.59,100.08 22.1,100.58 22.1,102.11 21.59,102.62 R14.1
N$11  (via drill 0.38)
  Top 0.152: R15.2 14.06,103.67 13.84,103.89 v13.21,103.89
  Bottom 0.152: JP20.1 12.19,102.36 12.7,102.87 12.7,103.38 v13.21,103.89
N$12  (via drill 0.38)
  Top 0.152: R13.2 23.5,102.62 22.73,101.85 22.73,99.44 v22.1,98.81
  Bottom 0.152: JP20.3 12.19,98.81 v22.1,98.81
N$13
  Top 0.152: D5.A 47.5,100.08 48.01,100.58 48.01,102.11 47.5,102.62 R18.1
N$14  (via drill 0.38)
  Top 0.152: R19.2 39.97,103.67 39.75,103.89 v39.12,103.89
  Bottom 0.152: JP25.1 38.1,102.36 38.61,102.87 38.61,103.38 v39.12,103.89
N$15  (via drill 0.38)
  Top 0.152: R17.2 49.4,102.62 48.64,101.85 48.64,99.44 v48.01,98.81
  Bottom 0.152: JP25.3 38.1,98.81 v48.01,98.81
N$16
  Top 0.152: D6.A 73.41,100.08 73.91,100.58 73.91,102.11 73.41,102.62 R22.1
N$17  (via drill 0.38)
  Top 0.152: R23.2 65.87,103.67 65.66,103.89 v65.02,103.89
  Bottom 0.152: JP30.1 64.01,102.36 64.52,102.87 64.52,103.38 v65.02,103.89
N$18  (via drill 0.38)
  Top 0.152: R21.2 75.31,102.62 74.55,101.85 74.55,99.44 v73.91,98.81
  Bottom 0.152: JP30.3 64.01,98.81 v73.91,98.81
SCL  (via drill 0.35, 0.38)
  Top 0.152: J4.4 25.38,43.92 | 25.38,43.92 24.51,43.05 U1.7 21.46,43.05 19.56,41.15 J6.3 | J2.1 24.64,56.39 26.76,54.27 R1.1 | J1.4 v11.94,39.88 | 25.38,43.92 24.64,44.66 v24.64,44.96
  Bottom 0.152: J2.1 23.37,47.5 24.64,46.23 v24.64,44.96 | v11.94,39.88 14.1,37.72 18.67,37.72 J6.3
SCL1  (via drill 0.35, 0.38)
  Top 0.152: J7.4 51.28,43.92 | 51.28,43.92 50.42,43.05 U2.7 47.37,43.05 45.47,41.15 J8.3 | J5.1 50.55,56.39 52.67,54.27 R2.1 | J3.4 v37.85,39.88 | 51.28,43.92 50.55,44.66 v50.55,44.96
  Bottom 0.152: J5.1 49.28,47.5 50.55,46.23 v50.55,44.96 | v37.85,39.88 40,37.72 44.58,37.72 J8.3
SCL2  (via drill 0.35, 0.38)
  Top 0.152: J11.4 77.19,43.92 | 77.19,43.92 76.33,43.05 U3.7 73.28,43.05 71.37,41.15 J12.3 | J10.1 76.45,56.39 78.57,54.27 R9.1 | J9.4 v63.75,39.88 | 77.19,43.92 76.45,44.66 v76.45,44.96
  Bottom 0.152: J10.1 75.18,47.5 76.45,46.23 v76.45,44.96 | v63.75,39.88 65.91,37.72 70.48,37.72 J12.3
SCL3  (via drill 0.35, 0.38)
  Top 0.152: J15.4 25.38,95.23 | 25.38,95.23 24.51,94.36 U4.7 21.46,94.36 19.56,92.46 J16.3 | J14.1 24.64,107.7 26.76,105.58 R13.1 | J13.4 v11.94,91.19 | 25.38,95.23 24.64,95.96 v24.64,96.27
  Bottom 0.152: J14.1 23.37,98.81 24.64,97.54 v24.64,96.27 | v11.94,91.19 14.1,89.03 18.67,89.03 J16.3
SCL4  (via drill 0.35, 0.38)
  Top 0.152: J19.4 51.28,95.23 | 51.28,95.23 50.42,94.36 U5.7 47.37,94.36 45.47,92.46 J20.3 | J18.1 50.55,107.7 52.67,105.58 R17.1 | J17.4 v37.85,91.19 | 51.28,95.23 50.55,95.96 v50.55,96.27
  Bottom 0.152: J18.1 49.28,98.81 50.55,97.54 v50.55,96.27 | v37.85,91.19 40,89.03 44.58,89.03 J20.3
SCL5  (via drill 0.35, 0.38)
  Top 0.152: J23.4 77.19,95.23 | 77.19,95.23 76.33,94.36 U6.7 73.28,94.36 71.37,92.46 J24.3 | J22.1 76.45,107.7 78.57,105.58 R21.1 | J21.4 v63.75,91.19 | 77.19,95.23 76.45,95.96 v76.45,96.27
  Bottom 0.152: J22.1 75.18,98.81 76.45,97.54 v76.45,96.27 | v63.75,91.19 65.91,89.03 70.48,89.03 J24.3
SDA  (via drill 0.35)
  Top 0.152: J4.3 26.16,42.93 25.78,42.54 25.78,41.66 24.64,40.51 | J2.2 20.83,55.12 20.32,54.61 13.34,54.61 12.36,53.63 12.36,52.58 | J1.3 v10.17,41.92 v10.16,41.91 10.03,42.04 10.03,50.67 10.67,51.31 11.94,52.58 12.36,52.58 | U1.5 24.64,40.51 | R7.1 12.36,52.58 | J6.4 20.57,37.08 23.11,37.08 24.64,38.61 24.64,40.51
  Bottom 0.152: J6.4 18.59,37.03 10.97,37.03 10.16,37.85 v10.16,41.91
SDA1  (via drill 0.35)
  Top 0.152: J7.3 52.07,42.93 51.69,42.54 51.69,41.66 50.55,40.51 | J5.2 46.74,55.12 46.23,54.61 39.24,54.61 38.27,53.63 38.27,52.58 | J3.3 v36.08,41.92 v36.07,41.91 35.94,42.04 35.94,50.67 36.58,51.31 37.85,52.58 38.27,52.58 | U2.5 50.55,40.51 | R4.1 38.27,52.58 | J8.4 46.48,37.08 49.02,37.08 50.55,38.61 50.55,40.51
  Bottom 0.152: J8.4 44.5,37.03 36.88,37.03 36.07,37.85 v36.07,41.91
SDA2  (via drill 0.35)
  Top 0.152: J11.3 78.99,42.93 77.98,42.93 77.6,42.54 77.6,41.66 76.45,40.51 | J10.2 72.64,55.12 72.14,54.61 65.15,54.61 64.17,53.63 64.17,52.58 | J9.3 v61.98,41.92 v61.98,41.91 61.85,42.04 61.85,50.67 62.48,51.31 63.75,52.58 64.17,52.58 | U3.5 76.45,40.51 | R11.1 64.17,52.58 | J12.4 72.39,37.08 74.93,37.08 76.45,38.61 76.45,40.51
  Bottom 0.152: J12.4 70.41,37.03 62.79,37.03 61.98,37.85 v61.98,41.91
SDA3  (via drill 0.35)
  Top 0.152: J15.3 26.16,94.23 25.78,93.85 25.78,92.96 24.64,91.82 | J14.2 20.83,106.43 20.32,105.92 13.34,105.92 12.36,104.94 12.36,103.89 | J13.3 v10.17,93.23 v10.16,93.22 10.03,93.34 10.03,101.98 10.67,102.62 11.94,103.89 12.36,103.89 | U4.5 24.64,91.82 | R15.1 12.36,103.89 | J16.4 20.57,88.39 23.11,88.39 24.64,89.92 24.64,91.82
  Bottom 0.152: J16.4 18.59,88.34 10.97,88.34 10.16,89.15 v10.16,93.22
SDA4  (via drill 0.35)
  Top 0.152: J19.3 52.07,94.23 51.69,93.85 51.69,92.96 50.55,91.82 | J18.2 46.74,106.43 46.23,105.92 39.24,105.92 38.27,104.94 38.27,103.89 | J17.3 v36.08,93.23 v36.07,93.22 35.94,93.34 35.94,101.98 36.58,102.62 37.85,103.89 38.27,103.89 | U5.5 50.55,91.82 | R19.1 38.27,103.89 | J20.4 46.48,88.39 49.02,88.39 50.55,89.92 50.55,91.82
  Bottom 0.152: J20.4 44.5,88.34 36.88,88.34 36.07,89.15 v36.07,93.22
SDA5  (via drill 0.35)
  Top 0.152: J23.3 78.99,94.23 77.98,94.23 77.6,93.85 77.6,92.96 76.45,91.82 | J22.2 72.64,106.43 72.14,105.92 65.15,105.92 64.17,104.94 64.17,103.89 | J21.3 v61.98,93.23 v61.98,93.22 61.85,93.34 61.85,101.98 62.48,102.62 63.75,103.89 64.17,103.89 | U6.5 76.45,91.82 | R23.1 64.17,103.89 | J24.4 72.39,88.39 74.93,88.39 76.45,89.92 76.45,91.82
  Bottom 0.152: J24.4 70.41,88.34 62.79,88.34 61.98,89.15 v61.98,93.22
VERTICAL
  Top 0.152: U1.2 13.84,43.05 13.21,42.42 13.21,28.45 14.1,27.56 14.1,24.26 S1.V2
VERTICAL1
  Top 0.152: U2.2 39.75,43.05 39.12,42.42 39.12,28.45 40,27.56 40,24.26 S2.V2
VERTICAL2
  Top 0.152: U3.2 65.66,43.05 65.02,42.42 65.02,28.45 65.91,27.56 65.91,24.26 S3.V2
VERTICAL3
  Top 0.152: U4.2 13.84,94.36 13.21,93.73 13.21,79.76 14.1,78.87 14.1,75.56 S4.V2
VERTICAL4
  Top 0.152: U5.2 39.75,94.36 39.12,93.73 39.12,79.76 40,78.87 40,75.56 S5.V2
VERTICAL5
  Top 0.152: U6.2 65.66,94.36 65.02,93.73 65.02,79.76 65.91,78.87 65.91,75.56 S6.V2

## Text on the board
Top: x03 | x03 | x03 | x03 | x03 | x03
Milling: v-score | v-score | v-score | v-score | v-score | v-score | v-score
tDocu: Nick Poole | Nick Poole | Nick Poole | Nick Poole | Nick Poole | Nick Poole